# EAGLE board 9pin_hex (EAGLE 6.2)
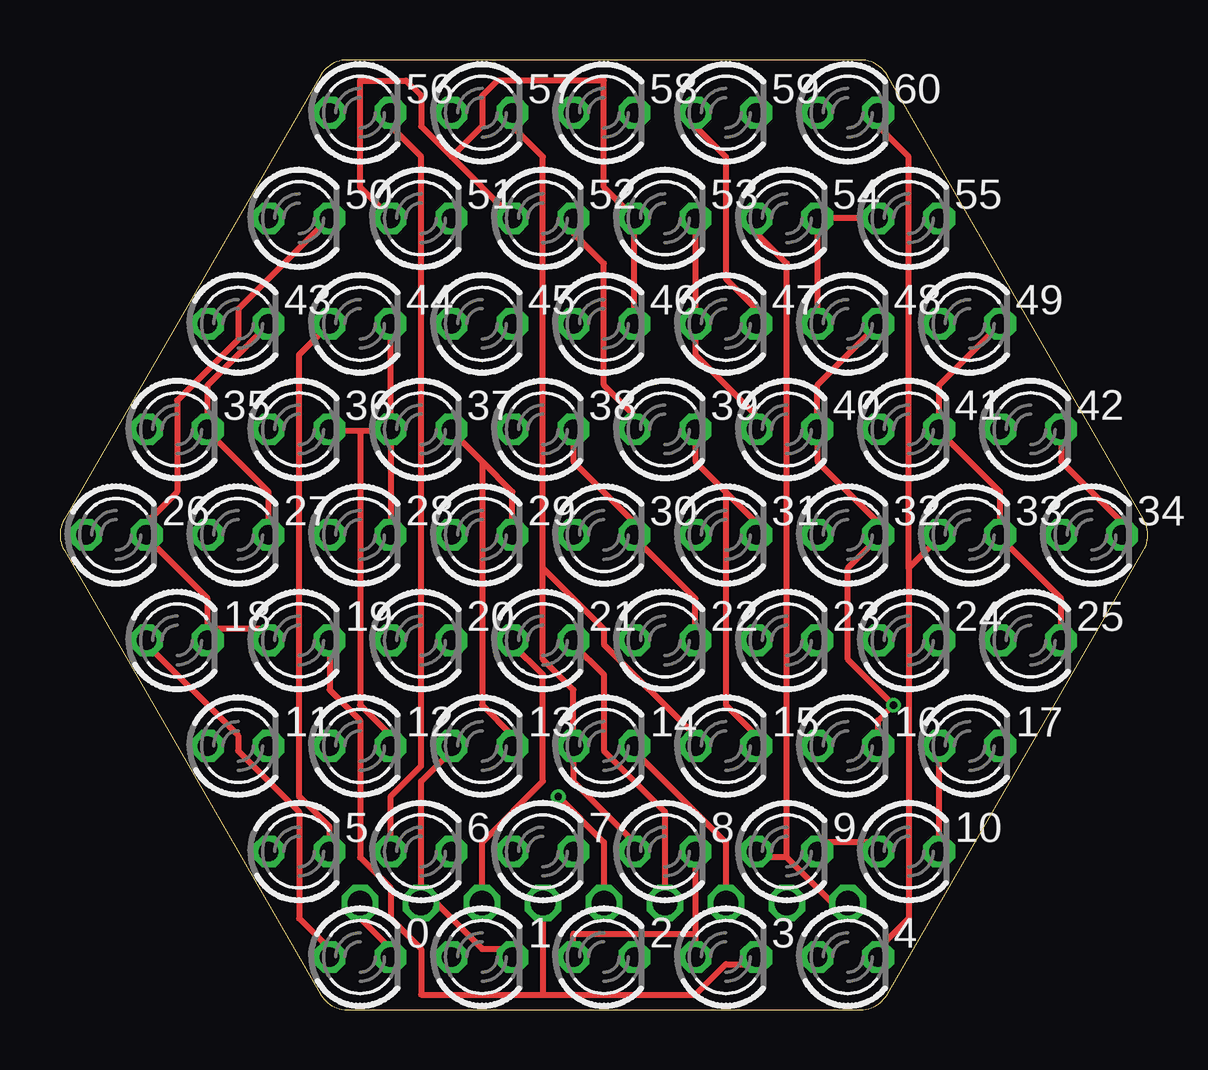
[diagram p0: board, top side]
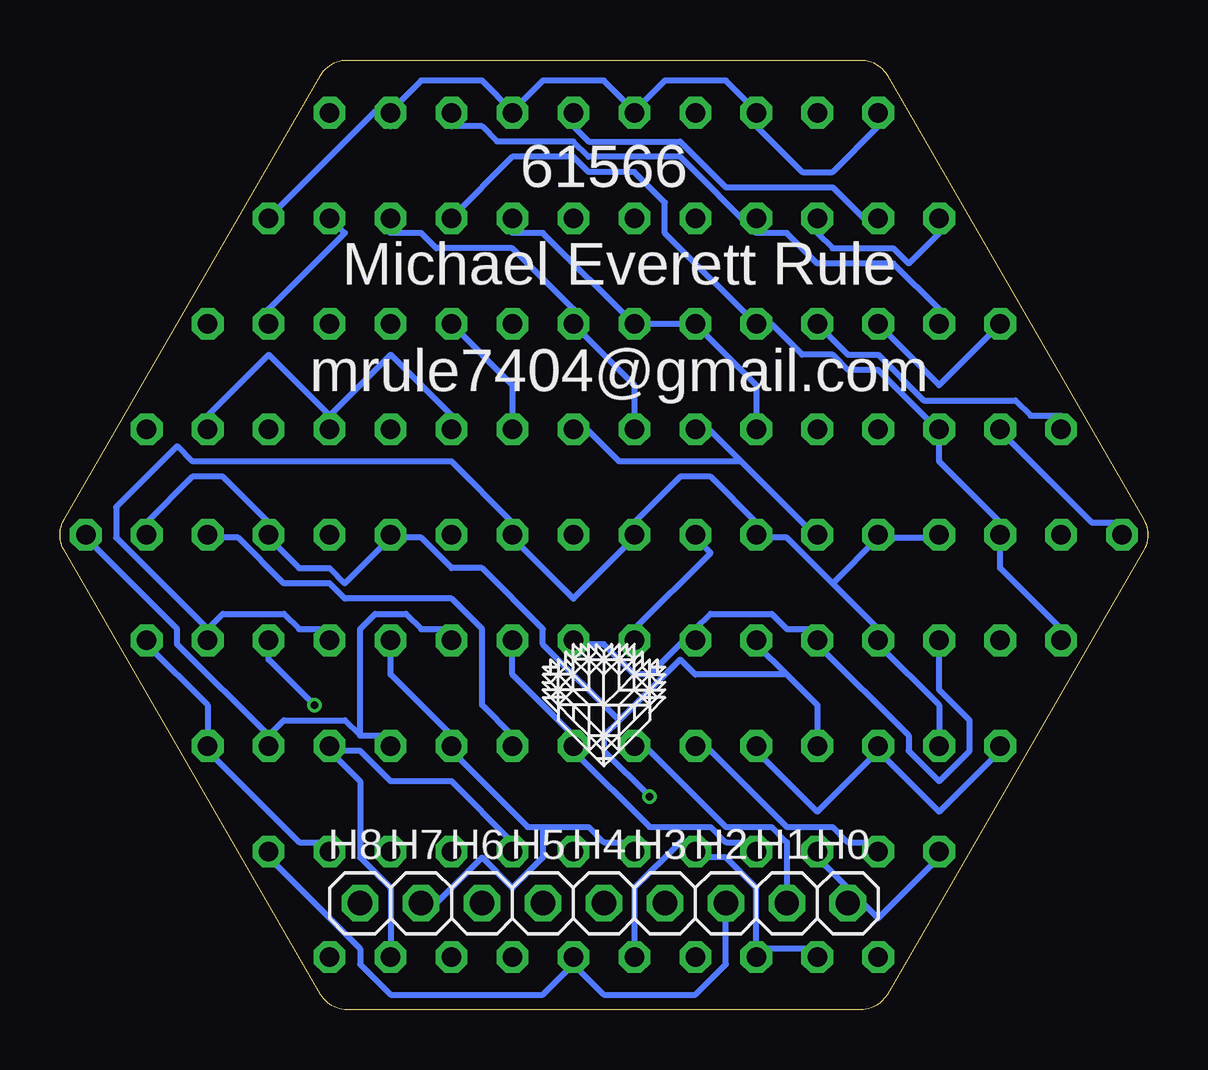
[diagram p1: board, bottom side, seen from below]

Size 45.33 x 39.59 mm. Coordinates in mm from the lower left corner, seen from the top.
Outline: 0.17,19.16 10.87,0.64 arc60 11.97,0 33.36,0 arc60 34.46,0.64 45.16,19.16 arc60 45.16,20.43 34.46,38.96 arc60 33.36,39.59 11.97,39.59 arc60 10.87,38.96 0.17,20.43 arc60 0.17,19.16
Copper layers (1*16): Top 0.035mm / dielectric 1.5mm / Bottom 0.035mm
Design rules: minimum track width 10mil, minimum drill 12mil, track to track 7mil, track to pad 7mil, pad to pad 7mil, via to via 7mil, smd to smd 0mil, copper to edge 12mil, drill to drill 10mil, minimum pad ring 10mil, minimum via ring 6mil, stop-mask expansion 2mil, vias tented up to drill 100mil, thermal gap 10mil

## Footprints (pad centres in the part's own frame; a part is rotated, then mirrored left to right if it is on the bottom)
LED3MM = drill 0.813 octagon: A -1.27,0; K 1.27,0
1X01 = drill 1.016 octagon: 1 0,0

## Placement (x,y rotation side)
0  [LED3MM]  12.5,2.2 0 top
1  [LED3MM]  17.58,2.2 0 top
2  [LED3MM]  22.66,2.2 0 top
3  [LED3MM]  27.74,2.2 0 top
4  [LED3MM]  32.82,2.2 0 top
5  [LED3MM]  9.96,6.6 0 top
6  [LED3MM]  15.04,6.6 0 top
7  [LED3MM]  20.12,6.6 0 top
8  [LED3MM]  25.2,6.6 0 top
9  [LED3MM]  30.28,6.6 0 top
10  [LED3MM]  35.36,6.6 0 top
11  [LED3MM]  7.42,11 0 top
12  [LED3MM]  12.5,11 0 top
13  [LED3MM]  17.58,11 0 top
14  [LED3MM]  22.66,11 0 top
15  [LED3MM]  27.74,11 0 top
16  [LED3MM]  32.82,11 0 top
17  [LED3MM]  37.9,11 0 top
18  [LED3MM]  4.88,15.4 0 top
19  [LED3MM]  9.96,15.4 0 top
20  [LED3MM]  15.04,15.4 0 top
21  [LED3MM]  20.12,15.4 0 top
22  [LED3MM]  25.2,15.4 0 top
23  [LED3MM]  30.28,15.4 0 top
24  [LED3MM]  35.36,15.4 0 top
25  [LED3MM]  40.44,15.4 0 top
26  [LED3MM]  2.34,19.8 0 top
27  [LED3MM]  7.42,19.8 0 top
28  [LED3MM]  12.5,19.8 0 top
29  [LED3MM]  17.58,19.8 0 top
30  [LED3MM]  22.66,19.8 0 top
31  [LED3MM]  27.74,19.8 0 top
32  [LED3MM]  32.82,19.8 0 top
33  [LED3MM]  37.9,19.8 0 top
34  [LED3MM]  42.98,19.8 0 top
35  [LED3MM]  4.88,24.2 0 top
36  [LED3MM]  9.96,24.2 0 top
37  [LED3MM]  15.04,24.2 0 top
38  [LED3MM]  20.12,24.2 0 top
39  [LED3MM]  25.2,24.2 0 top
40  [LED3MM]  30.28,24.2 0 top
41  [LED3MM]  35.36,24.2 0 top
42  [LED3MM]  40.44,24.2 0 top
43  [LED3MM]  7.42,28.6 0 top
44  [LED3MM]  12.5,28.6 0 top
45  [LED3MM]  17.58,28.6 0 top
46  [LED3MM]  22.66,28.6 0 top
47  [LED3MM]  27.74,28.6 0 top
48  [LED3MM]  32.82,28.6 0 top
49  [LED3MM]  37.9,28.6 0 top
50  [LED3MM]  9.96,33 0 top
51  [LED3MM]  15.04,33 0 top
52  [LED3MM]  20.12,33 0 top
53  [LED3MM]  25.2,33 0 top
54  [LED3MM]  30.28,33 0 top
55  [LED3MM]  35.36,33 0 top
56  [LED3MM]  12.5,37.39 0 top
57  [LED3MM]  17.58,37.39 0 top
58  [LED3MM]  22.66,37.39 0 top
59  [LED3MM]  27.74,37.39 0 top
60  [LED3MM]  32.82,37.39 0 top
H0  [1X01]  12.5,4.45 0 bottom
H1  [1X01]  15.04,4.45 0 bottom
H2  [1X01]  17.58,4.45 0 bottom
H3  [1X01]  20.12,4.45 0 bottom
H4  [1X01]  22.66,4.45 0 bottom
H5  [1X01]  25.2,4.45 0 bottom
H6  [1X01]  27.74,4.45 0 bottom
H7  [1X01]  30.28,4.45 0 bottom
H8  [1X01]  32.82,4.45 0 bottom
H9  [LOGO]  22.66,12.7 0 bottom

## Library data of the parts
0 1-60 = led
H0 H1-H8 = pinhead
H9 = mrule2

## Nets
S0: 0.K 1.A 2.A 3.A 4.A 5.A 6.A 7.A 8.K 16.K 24.K 32.K 40.K 48.K 56.K H0.1
S1: 1.K 8.A 9.K 10.A 11.A 12.A 13.A 14.A 15.A 17.K 25.K 33.K 41.K 49.K 57.K H1.1
S2: 2.K 10.K 16.A 17.A 18.K 19.A 20.A 21.A 22.A 23.A 26.K 34.K 42.K 50.K 58.K H2.1
S3: 3.K 11.K 19.K 24.A 25.A 26.A 27.K 28.A 29.A 30.A 31.A 35.K 43.K 51.K 59.K H3.1
S4: 4.K 12.K 20.K 28.K 32.A 33.A 34.A 35.A 36.K 37.A 38.A 39.A 44.K 52.K 60.K H4.1
S5: 5.K 13.K 21.K 29.K 37.K 40.A 41.A 42.A 43.A 44.A 45.K 46.A 47.A 53.K H5.1
S6: 6.K 14.K 22.K 30.K 38.K 46.K 48.A 49.A 50.A 51.A 52.A 53.A 54.K 55.A H6.1
S7: 7.K 15.K 23.K 31.K 39.K 47.K 55.K 56.A 57.A 58.A 59.A 60.A H7.1
S8: 0.A 9.A 18.A 27.A 36.A 45.A 54.A H8.1

## Tracks (layer width: path | path; a pad name or v marks a point on that pad's centre or on a via)
S0  (via drill 0.3)
  Top 0.254: 48.K 34.09,28.57 31.55,26.04 40.K 31.55,22.86 34.09,20.32 32.K 34.09,19.68 32.82,18.41 32.82,14.61 v34.73,12.7 34.09,12.06 16.K | 8.K 26.47,3.17 | 26.47,3.17 3.A | H0.1 12.5,3.81 13.77,2.54 0.K | 26.47,3.17 21.39,3.17 2.A | 6.A 13.77,8.89 15.04,10.16 15.04,35.56 13.77,36.83 56.K
  Bottom 0.254: 4.A 31.55,5.08 32.82,6.35 32.82,9.53 34.09,10.79 | 24.K 36.63,14.61 v34.73,12.7 | 16.31,2.54 13.77,2.54 0.K | 18.85,6.35 17.58,6.35 16.31,5.08 16.31,2.54 | 16.31,2.54 1.A | 2.A 21.39,5.08 19.49,6.99 18.85,6.35 | 18.85,6.35 7.A | 11.87,4.45 13.77,6.35 6.A | 11.87,4.45 11.23,3.81 8.69,6.35 5.A | 11.87,4.45 H0.1 | 34.09,10.79 32.82,10.79 31.55,9.53 29.01,9.53 26.47,6.99 8.K | 34.09,10.79 16.K
S1
  Top 0.254: 9.K 31.55,6.99 34.09,6.99 10.A | 25.K 41.71,17.14 39.17,19.68 33.K 39.17,21.59 36.63,24.13 41.K 36.63,26.04 39.17,28.57 49.K | 15.04,5.08 15.04,9.53 16.31,10.79 13.A | 15.04,5.08 17.58,2.54 18.85,2.54 1.K | 15.04,5.08 H1.1 | 20.12,18.41 20.12,14.61 21.39,13.34 14.A 21.39,9.53 23.93,6.99 8.A | 20.12,18.41 20.12,35.56 18.85,36.83 57.K | 20.12,18.41 22.66,15.88 22.66,15.24 26.47,11.43 15.A
  Bottom 0.254: 25.K 41.71,15.24 39.17,12.7 17.K 39.17,10.79 35.36,6.99 34.09,6.99 10.A | 11.23,10.79 8.69,8.26 6.15,10.79 11.A | 11.23,10.79 13.77,8.26 16.31,10.79 13.A | 11.23,10.79 12.A | H1.1 15.04,6.99 15.68,7.62 17.58,7.62 21.39,11.43 14.A | 33.K 39.17,19.68 37.9,19.68 36,17.78 34.09,17.78 33.46,17.14 29.01,17.14 27.74,15.88 27.74,12.7 26.47,11.43 15.A
S2
  Top 0.254: 6.15,15.88 8.69,15.88 19.A | 6.15,15.88 6.15,17.14 3.61,19.68 26.K 3.61,20.32 4.88,21.59 4.88,25.4 7.42,27.94 7.42,29.21 11.23,33.02 50.K | 6.15,15.88 18.K | 42.K 41.71,22.86 44.25,20.32 34.K | H2.1 17.58,6.99 20.12,9.53 20.12,13.97 18.85,15.24 21.A | 10.K 17.A
  Bottom 0.254: 50.K 11.23,33.02 11.87,33.02 13.14,34.29 17.58,34.29 19.49,36.2 23.3,36.2 23.93,36.83 58.K | 32.82,11.43 31.55,11.43 16.A | 32.82,11.43 33.46,12.06 36,12.06 36.63,11.43 | 32.82,11.43 32.82,15.88 32.19,16.51 30.92,16.51 30.28,15.88 29.01,15.88 23.A | 36.63,11.43 40.44,15.24 40.44,15.88 44.25,19.68 34.K | 36.63,11.43 17.A | 18.85,15.88 18.22,16.51 15.68,16.51 15.04,15.88 13.77,15.88 20.A 13.77,15.24 9.96,11.43 9.96,10.79 8.69,9.53 7.42,10.79 7.42,12.06 8.69,13.34 19.A | 18.85,15.88 20.76,13.97 21.39,13.97 22.66,15.24 23.93,15.24 22.A | 18.85,15.88 21.A | 23.93,1.91 25.2,0.64 31.55,0.64 32.82,1.91 32.82,2.54 36.63,6.35 10.K | H2.1 17.58,1.91 18.85,0.64 22.66,0.64 23.93,1.91 | 23.93,1.91 2.K
S3
  Top 0.254: 43.K 8.69,28.57 6.15,26.04 35.K 6.15,24.13 8.69,21.59 27.K | 20.12,0.64 26.47,0.64 27.74,1.91 29.01,1.91 3.K | H3.1 20.12,0.64 | 20.12,0.64 15.04,0.64 15.04,2.54 13.77,3.81 13.77,5.08 12.5,6.35 12.5,12.06 11.23,13.34 19.K
  Bottom 0.254: 26.A 1.07,20.32 2.34,20.32 6.15,24.13 35.K | 16.31,32.38 15.04,32.38 13.77,31.11 10.6,31.11 8.69,29.21 43.K | 16.31,32.38 19.49,35.56 23.3,35.56 23.93,36.2 27.11,36.2 27.74,36.83 29.01,36.83 59.K | 16.31,32.38 51.K | 39.17,15.88 38.54,16.51 36,16.51 35.36,15.88 34.09,15.88 24.A | 39.17,15.88 42.98,19.68 42.98,20.95 40.44,23.5 39.81,22.86 29.01,22.86 26.47,20.32 31.A 26.47,19.68 23.93,17.14 21.39,19.68 30.A 21.39,20.32 19.49,22.23 18.22,22.23 16.31,20.32 29.A 16.31,19.68 15.04,19.68 13.14,17.78 | 39.17,15.88 25.A | 11.23,19.68 8.69,19.68 27.K | 11.K 8.69,12.7 11.23,15.24 19.K 11.23,15.88 13.14,17.78 | 13.14,17.78 11.23,19.68 | 11.23,19.68 28.A
S4  (via drill 0.3)
  Top 0.254: 35.36,18.41 35.36,3.81 34.09,2.54 4.K | 35.36,18.41 36.63,19.68 33.A | 35.36,18.41 35.36,35.56 34.09,36.83 60.K | H4.1 22.66,6.99 v20.76,8.89 | 13.77,24.13 28.K | 13.77,24.13 12.5,24.13 | 12.5,24.13 11.23,24.13 36.K | 13.77,24.13 37.A 44.K | 52.K 21.39,32.38 22.66,31.11 22.66,26.04 23.93,24.77 39.A | 12.5,24.13 12.5,12.7 13.77,11.43 12.K
  Bottom 0.254: 31.55,19.68 33.46,17.78 34.09,18.41 35.36,18.41 36.63,19.68 33.A 36.63,20.32 38.54,22.23 39.81,22.23 41.71,20.32 34.A | 12.K 13.77,12.7 15.04,13.97 | 15.04,13.97 16.31,15.24 20.K | v20.76,8.89 22.66,10.79 22.66,11.43 22.03,12.06 | 22.03,12.06 19.49,14.61 18.85,13.97 15.04,13.97 | 35.A 3.61,24.77 4.88,24.77 5.52,25.4 9.33,25.4 11.23,27.3 12.5,27.3 13.77,28.57 44.K | 16.95,22.86 13.77,19.68 28.K | 16.95,22.86 18.22,24.13 18.85,24.13 38.A | 16.95,22.86 22.03,22.86 23.3,24.13 23.93,24.13 39.A | 31.55,19.68 30.28,19.68 29.01,18.41 27.74,18.41 25.2,15.88 25.2,15.24 22.03,12.06 | 31.55,19.68 32.A
S5
  Top 0.254: 5.K 11.23,7.62 9.96,8.89 9.96,27.3 11.23,28.57 44.A | 53.K 47.A 26.47,27.3 29.01,24.77 40.A | H5.1 25.2,8.26 22.66,10.79 22.66,13.97 21.39,15.24 21.K | 17.58,22.86 18.85,21.59 29.K | 17.58,22.86 16.31,24.13 37.K | 17.58,22.86 17.58,12.7 18.85,11.43 13.K
  Bottom 0.254: 43.A 6.15,28.57 8.69,26.04 11.23,28.57 44.A | 5.K 11.23,6.99 12.5,6.99 13.14,7.62 15.04,7.62 18.85,11.43 13.K | 34.09,24.77 31.55,27.3 29.01,24.77 40.A | 34.09,24.77 36.63,27.3 39.17,24.77 42.A | 34.09,24.77 41.A | 37.K 16.31,26.04 18.85,28.57 | 18.85,28.57 21.39,28.57 | 18.85,28.57 45.K | 21.K 21.39,15.88 18.22,19.05 18.85,19.68 29.K | 21.39,28.57 25.2,32.38 26.47,32.38 53.K | 21.39,28.57 46.A
S6
  Top 0.254: 22.K 26.47,17.14 23.93,19.68 30.K 23.93,20.32 21.39,22.86 38.K | H6.1 27.74,6.99 23.93,10.79 14.K | 16.31,35.56 15.04,36.83 15.04,38.1 14.41,38.73 12.5,38.73 12.5,34.29 13.77,33.02 51.A | 16.31,35.56 18.85,33.02 52.A | 48.A 54.K 31.55,33.02 34.09,33.02 55.A | 46.K 53.A 23.93,33.02 22.66,34.29 22.66,38.73 18.22,38.73 17.58,38.1 17.58,36.83 16.31,35.56
  Bottom 0.254: 6.K 16.31,6.99 17.58,6.99 18.22,7.62 20.76,7.62 23.93,10.79 14.K 23.93,11.43 26.47,13.97 22.K | 50.A 8.69,32.38 9.96,31.11 10.6,31.75 13.14,31.75 13.77,32.38 51.A | 49.A 36.63,29.21 33.46,32.38 34.09,33.02 55.A | 38.K 21.39,26.04 23.93,28.57 46.K 23.93,29.21 26.47,31.75 29.65,31.75 30.28,32.38 31.55,32.38 54.K
S7
  Top 0.254: 27.74,21.59 26.47,22.86 39.K | 27.74,21.59 29.01,20.32 31.K | 47.K 29.01,29.21 27.74,30.48 27.74,35.56 26.47,36.83 59.A | 27.74,21.59 27.74,12.7 29.01,11.43 15.K
  Bottom 0.254: 25.2,7.62 25.84,7.62 29.01,10.79 15.K 29.01,11.43 31.55,13.97 23.K | 25.2,7.62 23.3,7.62 22.66,6.99 21.39,6.99 7.K | H7.1 29.65,4.45 27.74,6.35 26.47,5.08 25.2,6.35 25.2,7.62 | 39.K 26.47,26.04 29.01,28.57 47.K | 56.A 11.23,36.83 13.14,34.92 14.41,34.92 16.31,36.83 57.A 16.31,37.47 17.58,38.73 20.12,38.73 21.39,37.47 | 26.47,37.47 25.2,38.73 22.66,38.73 21.39,37.47 | 21.39,37.47 58.A | 26.47,37.47 27.74,38.73 30.28,38.73 31.55,37.47 60.A 31.55,36.83 32.19,37.47 36.63,33.02 55.K | 26.47,37.47 59.A
S8
  Top 0.254: 30.28,6.35 29.01,6.35 9.A | 30.28,6.35 32.19,4.45 H8.1 | 30.28,6.35 30.28,31.11 29.01,32.38 54.A | 0.A 11.23,2.54 9.96,3.81 9.96,8.26 7.42,10.79 7.42,11.43 3.61,15.24 18.A
  Bottom 0.254: 18.A 3.61,15.88 6.15,18.41 27.A 6.15,20.32 8.69,22.86 8.69,24.13 | 16.31,28.57 15.68,28.57 14.41,27.3 13.14,27.3 12.5,26.67 11.23,26.67 8.69,24.13 | 8.69,24.13 36.A | 16.31,28.57 20.12,32.38 20.12,33.66 21.39,34.92 23.3,34.92 23.93,35.56 26.47,35.56 29.01,33.02 54.A | 16.31,28.57 45.A

## Text on the board
bPlace: 61566 | Michael Everett Rule | mrule7404@gmail.com